# EAGLE board ld (EAGLE 9.5.1)
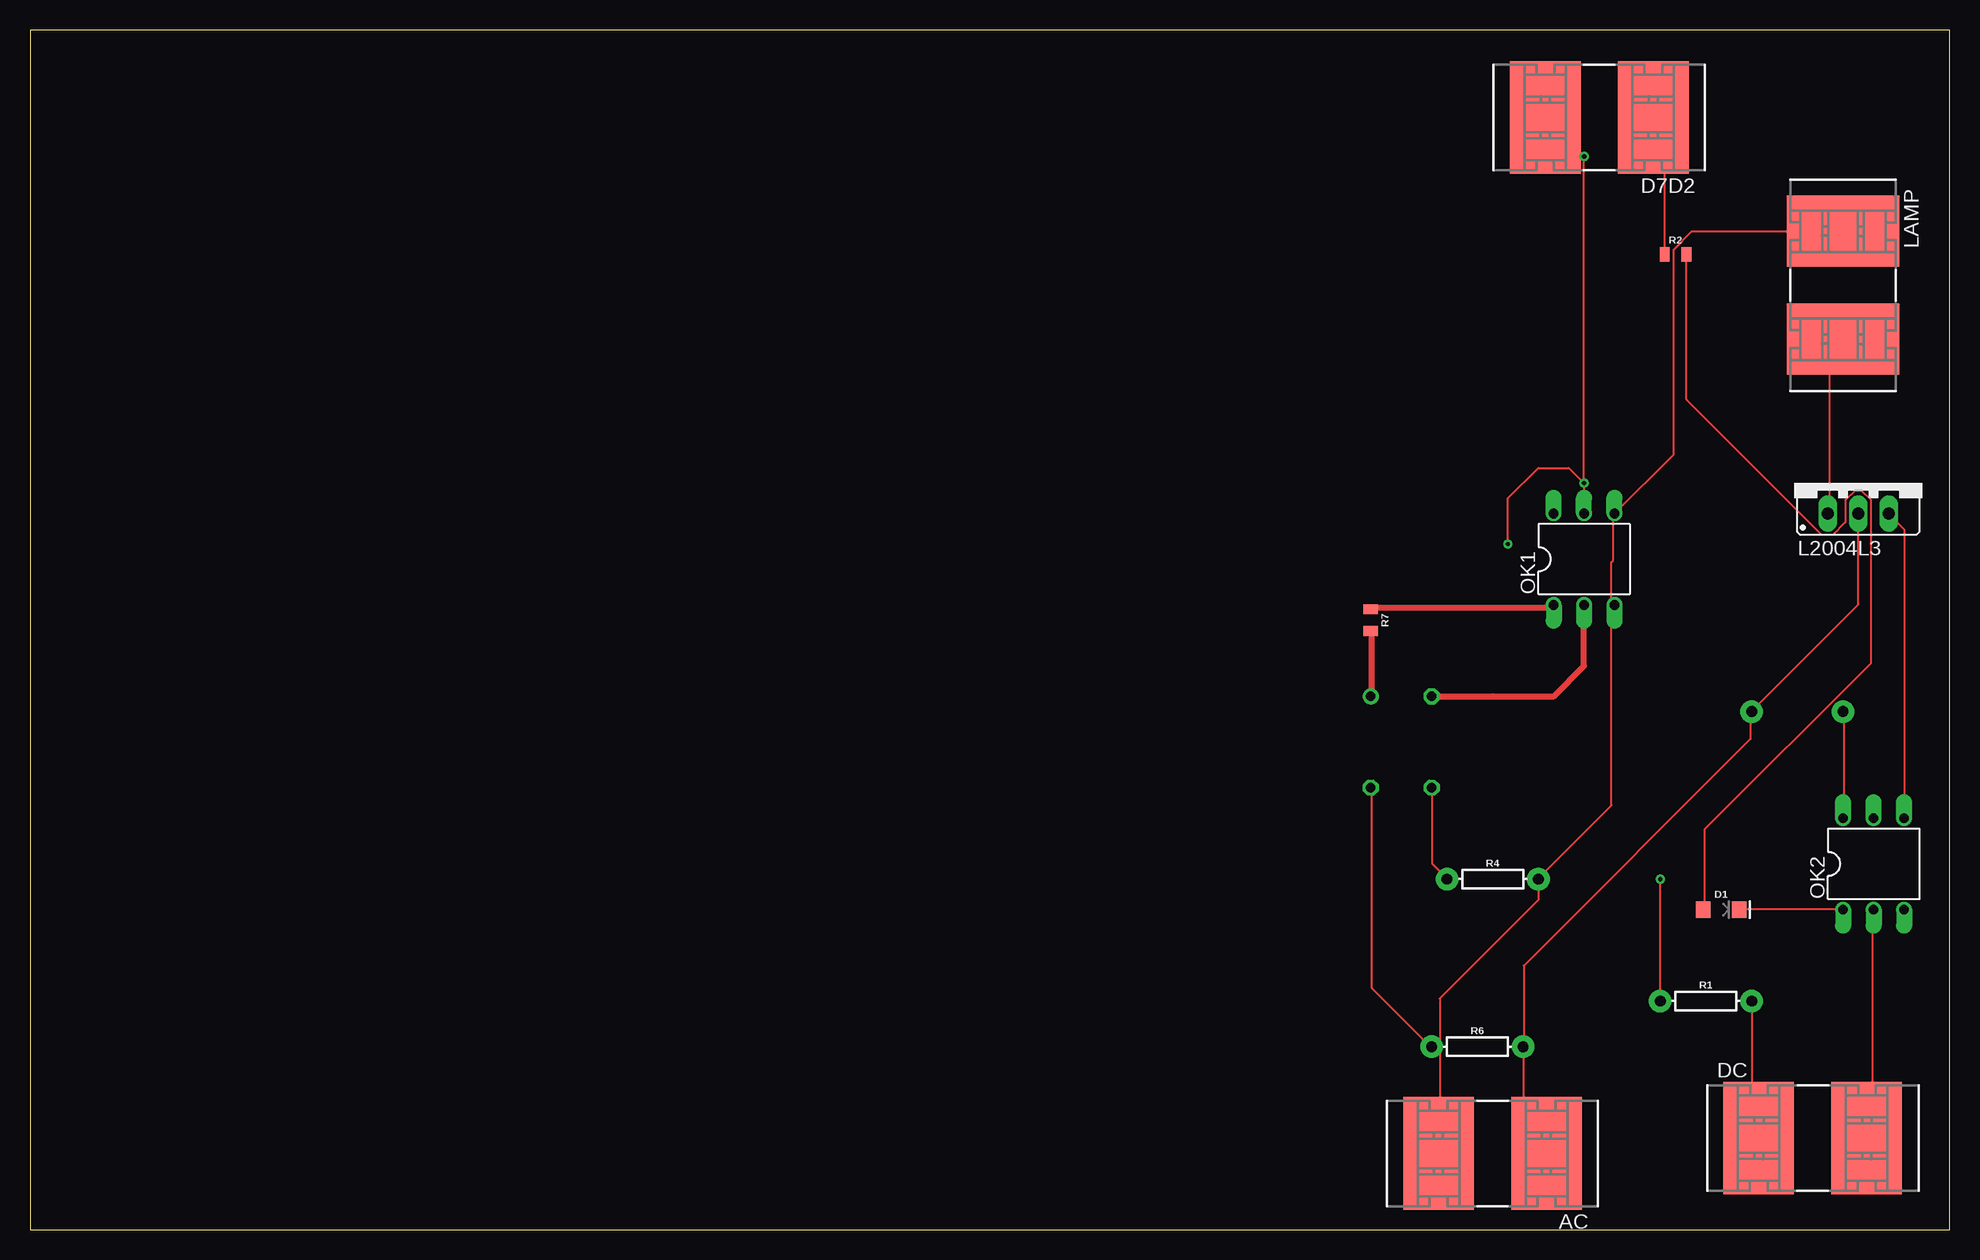
[diagram p0: board, top side]
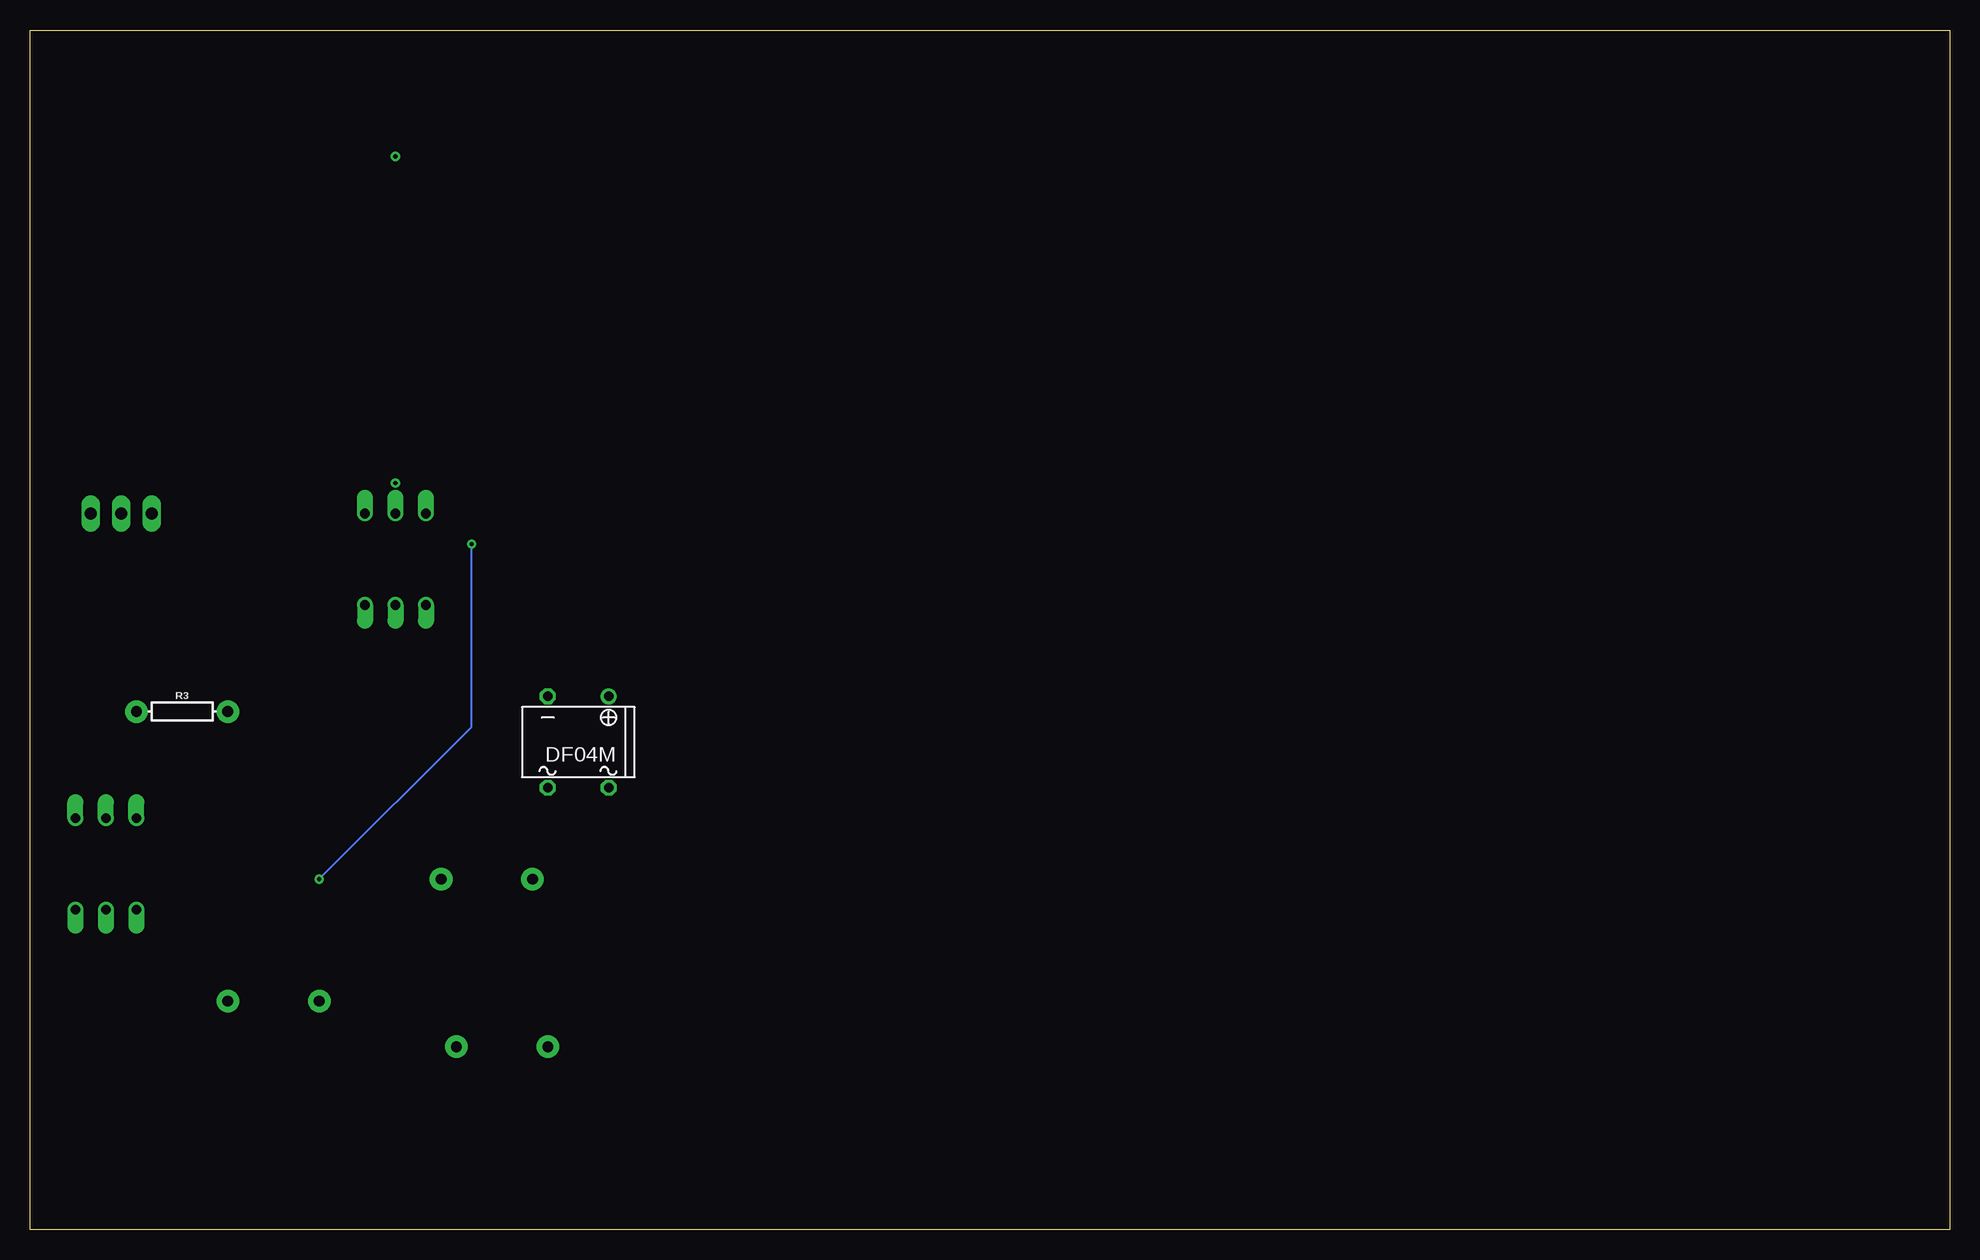
[diagram p1: board, bottom side, seen from below]

Size 160 x 100 mm. Coordinates in mm from the lower left corner, seen from the top.
Outline: 0,0 160,0 160,100 0,100 0,0
Copper layers (1*16): Top 0.035mm / dielectric 1.5mm / Bottom 0.035mm
Design rules "default": minimum track width 6mil, minimum drill 0.35mm, track to track 6mil, track to pad 6mil, pad to pad 6mil, via to via 6mil, smd to smd 6mil, copper to edge 40mil, drill to drill 6mil, minimum pad ring 10mil, minimum via ring 8mil, stop-mask expansion 4mil, vias tented up to drill 0mil, thermal gap 10mil

## Footprints (pad centres in the part's own frame; a part is rotated, then mirrored left to right if it is on the bottom)
009177002 = smd 5.9 x 9.4: 1 -4.5,0; 2 4.5,0
LED-1206 = smd 1.2 x 1.4: A -1.5,0; C 1.5,0
B-DIL = drill 0.813: + -2.54,-3.81 | drill 0.813 octagon: - 2.54,-3.81; AC1 2.54,3.81; AC2 -2.54,3.81
TO220DS = drill 1.016 long: A1 -2.54,-2.54; A2 0,-2.54; G 2.54,-2.54
DIL06 = drill 0.813 offset: 1 -2.54,-3.81; 2 0,-3.81; 3 2.54,-3.81; 4 2.54,3.81; 5 0,3.81; 6 -2.54,3.81
AXIAL-0.3 = drill 0.9 pad 1.88: P$1 -3.81,0; P$2 3.81,0
0805 = smd 0.8 x 1.2: 1 -0.9,0; 2 0.9,0

## Placement (x,y rotation side)
AC  009177002  [009177002]  121.92,6.35 180 top
D1  [LED-1206]  140.97,26.67 0 top
D7D2  009177002  [009177002]  130.81,92.71 180 top
DC  009177002  [009177002]  148.59,7.62 0 top
DF04M  12V  [B-DIL]  114.3,40.64 180 bottom
L2004L3  TIC225S  [TO220DS]  152.4,62.23 0 top
LAMP  009177002  [009177002]  151.13,78.74 270 top
OK1  4N25M  [DIL06]  129.54,55.88 0 top
OK2  MOC3021M  [DIL06]  153.67,30.48 0 top
R1  1k  [AXIAL-0.3]  139.7,19.05 0 top
R2  220  [0805]  137.16,81.28 0 top
R3  1k  [AXIAL-0.3]  147.32,43.18 0 bottom
R4  1k  [AXIAL-0.3]  121.92,29.21 0 top
R6  1k  [AXIAL-0.3]  120.65,15.24 0 top
R7  1k  [0805]  111.76,50.8 270 top

## Library data of the parts
AC D7D2 DC LAMP = con-avx; MPN: 009177002001006; OC_FARNELL: unknown; OC_NEWARK: 09P1124
D1 = SparkFun-LED
DF04M = rectifier
L2004L3 = triac
OK1 = optocoupler; MPN: 4N25-M; OC_FARNELL: 1021349; OC_NEWARK: 98K9084
OK2 = optocoupler; MF: FAIRCHILD SEMICONDUCTOR; MPN: MOC3021-M; OC_FARNELL: 1021365; OC_NEWARK: 95B7895
R1 R3 R4 R6 = SparkFun-Resistors; PROD_ID: RES-12182
R2 R7 = SparkFun-Resistors; PROD_ID: RES-08474

## Nets
GND: AC.2 LAMP.1 OK1.4 R4.P$2
IO2: D7D2.2 OK1.5 R1.P$1
N$1: DF04M.+ R7.2
N$2: D1.A R2.2
N$3: D1.C OK2.1
N$4: D7D2.1 R2.1
N$5: DC.1 R1.P$2
N$6: OK2.6 R3.P$1
N$7: L2004L3.G OK2.4
N$8: OK1.1 R7.1
N$9: DF04M.- OK1.2
N$10: DF04M.AC1 R4.P$1
N$11: DC.2 OK2.2
N$12: AC.1 L2004L3.A2 R3.P$2 R6.P$2
N$13: DF04M.AC2 R6.P$1
N$15: L2004L3.A1 LAMP.2

## Tracks (layer width: path | path; a pad name or v marks a point on that pad's centre or on a via)
GND
  Top 0.152: AC.2 117.5,6.4 117.5,19.25 125.73,27.48 R4.P$2 125.73,29.26 131.83,35.36 131.83,55.63 131.98,55.78 131.98,59.59 OK1.4 137.01,64.62 137.01,81.69 138.53,83.21 151.03,83.21 LAMP.1
IO2  (via drill 0.35)
  Top 0.152: v129.54,62.23 OK1.5 129.54,60.96 | D7D2.2 126.34,92.66 v129.54,89.46 v129.54,62.23 | R1.P$1 v135.89,29.21 | v129.54,62.23 128.27,63.5 125.73,63.5 123.19,60.96 v123.19,57.15
  Bottom 0.152: 135.79,19.05 R1.P$1 | 129.54,59.59 OK1.5 | v135.89,29.21 123.19,41.91 v123.19,57.15
N$1
  Top 0.152: 111.86,49.84 R7.2 | 111.86,44.5 DF04M.+
  Top 0.508: 111.86,44.5 111.86,49.84
N$2
  Top 0.152: R2.2 138.07,81.23 138.07,69.19 149.35,57.91 150.27,57.91 151.33,58.98 151.33,60.81 152.09,61.57 152.71,61.57 153.47,60.81 153.47,47.24 139.6,33.38 139.6,26.67 D1.A
N$3
  Top 0.152: OK2.1 D1.C
N$4
  Top 0.152: R2.1 136.25,81.38 136.25,91.75 135.33,92.66 D7D2.1
N$5
  Top 0.152: R1.P$2 143.56,19.05 143.56,8.08 144.02,7.62 DC.1
N$6
  Top 0.152: OK2.6 151.18,34.29 151.18,43.13 R3.P$1
N$7
  Top 0.152: OK2.4 156.21,58.37 154.99,59.59 L2004L3.G
N$8
  Top 0.152: 126.8,51.82 126.95,51.97 OK1.1 | 111.86,51.82 R7.1
  Top 0.508: 126.8,51.82 111.86,51.82
N$9
  Top 0.508: DF04M.- 121.92,44.45 127,44.45 129.54,46.99 OK1.2
  Bottom 0.152: DF04M.- 116.89,44.5
N$10
  Top 0.152: DF04M.AC1 116.89,36.73 116.89,30.48 118.11,29.26 R4.P$1
N$11
  Top 0.152: OK2.2 153.62,26.67 153.62,8.08 153.16,7.62 DC.2
N$12
  Top 0.152: 124.51,15.24 124.51,8.23 126.34,6.4 AC.1 | L2004L3.A2 152.4,52.12 143.56,43.28 R3.P$2 143.41,43.13 143.41,40.89 124.51,22 124.51,15.24 | 124.51,15.24 R6.P$2
N$13
  Top 0.152: DF04M.AC2 111.86,36.73 111.86,20.12 116.74,15.24 R6.P$1
N$15
  Top 0.152: L2004L3.A1 149.96,59.74 149.96,73.15 151.03,74.22 LAMP.2